# Altium PCB PCB1.PcbDoc
Units mm, origin at the board's own origin, x right, y up, seen from the top; angles counter-clockwise.
Board outline 145.98 x 58.34 mm, 2 copper layers (Top Layer, Bottom Layer), stack 1.671 mm thick; 13 components, 13 nets, 88 pads, 16 vias.
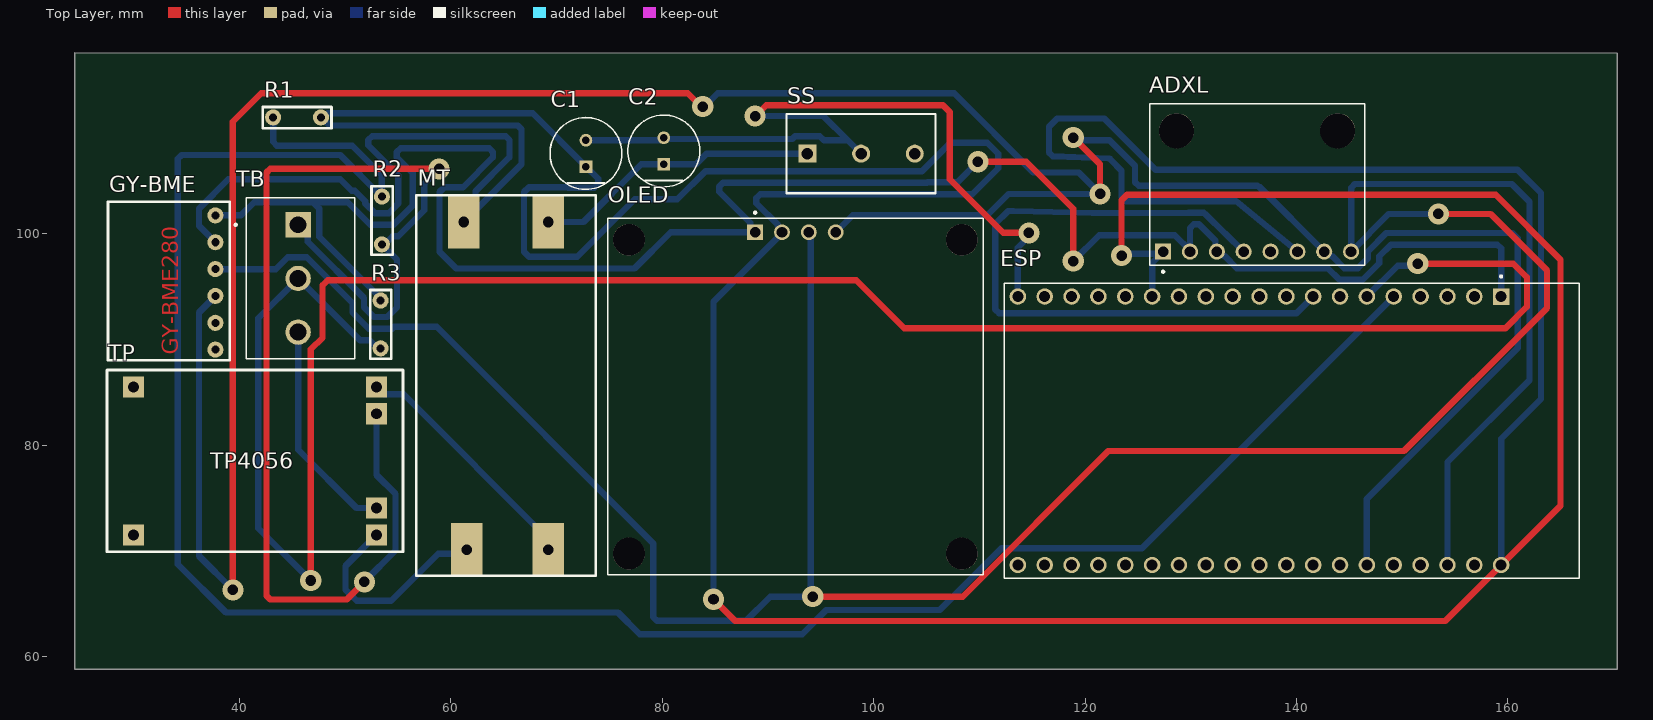
[diagram p0: Top Layer view]
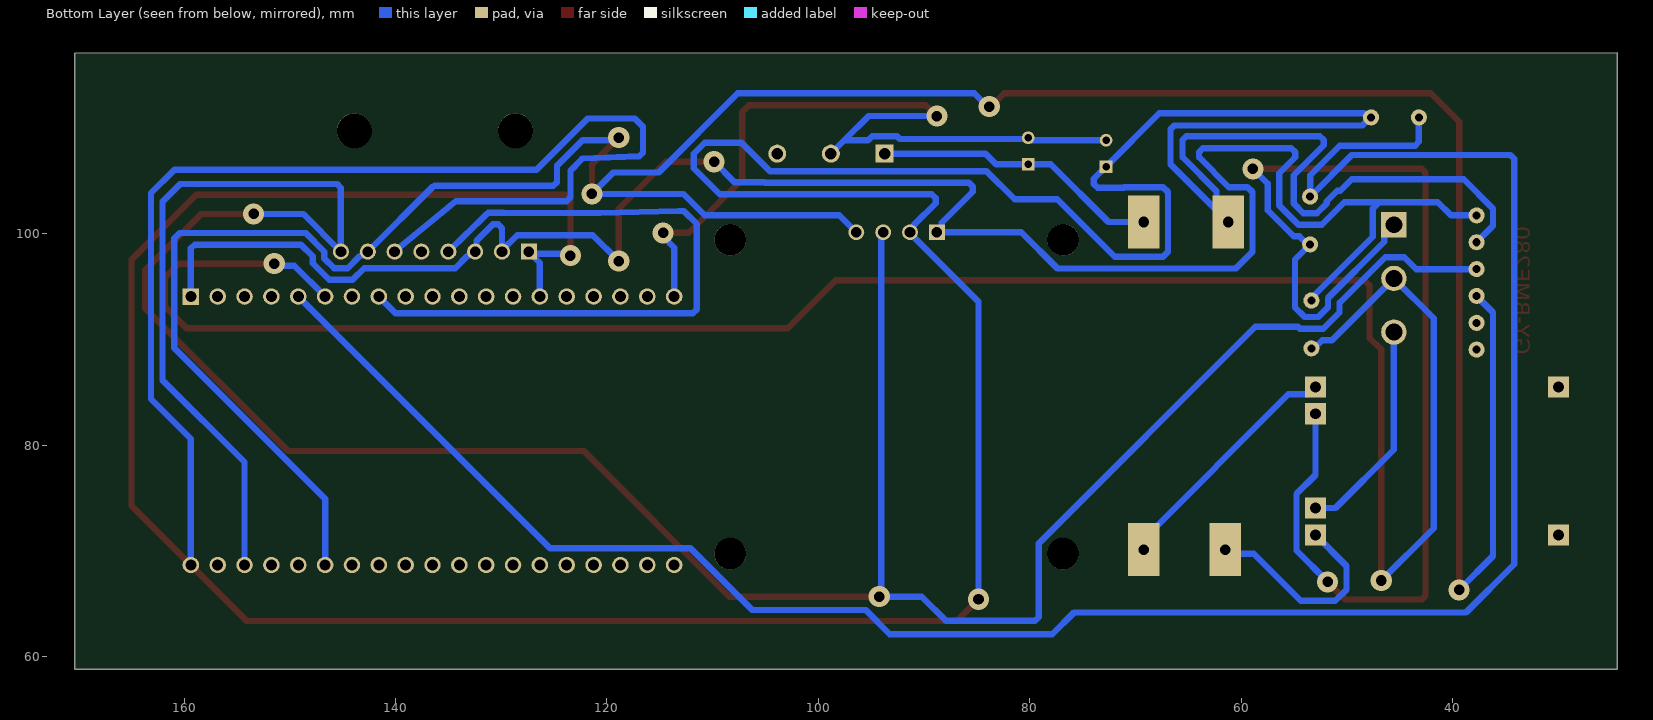
[diagram p1: Bottom Layer view, seen from below]

## Layer stack, top to bottom
Top Solder: solder mask 0.0102, Solder Resist, Dk 3.5
Top Layer: signal copper 0.0356
Dielectric 1: dielectric 1.6, FR-4, Dk 4.8
Bottom Layer: signal copper 0.0356
Bottom Solder: solder mask 0.0102, Solder Resist, Dk 3.5

## Board outline
24.384,58.801 170.365,58.807 170.365,117.05 24.384,117.138

## Design rules (kind name [scope] priority, off if disabled: settings)
BoardOutlineClearance BoardOutlineClearance_1 [All] p1: gap=1 ignorepadtopadclearanceinfootprint=FALSE
Clearance [All] p1: gap=0.5 ignorepadtopadclearanceinfootprint=FALSE
HoleSize [All] p1: absolutevalues=TRUE maxlimit=4 minlimit=0.5 maxpercent=80.000 minpercent=20.000
HoleToHoleClearance [All] p1: gap=0.5 allowstackedmicrovias=TRUE
MinimumSolderMaskSliver [All] p1: minsoldermaskwidth=0.5
PolygonConnect [All] p1: connectstyle=Relief reliefconductorwidth=0.254 reliefentries=4 polygonreliefangle="90 Angle" airgapwidth=0.254
RoutingVias [All] p1: holewidth=1 width=2 viastyle="Through Hole" minholewidth=1 minwidth=2 maxholewidth=1 maxwidth=2
SolderMaskExpansion [All] p1: expansion=0.102 istentingtop=FALSE
Width [All] p1: maxlimit=1 minlimit=0.5 preferedwidth=0.6
27 further rules are at their usual default settings.

## Classes and differential pairs
component class Sheet1: ADXL C1 C2 ESP GY-BME MT OLED R1 R2 R3 SS TB

## Components (designator, comment, footprint, x,y, rotation, side; value= is the part's Value field where it differs from the comment)
ADXL "ADXL345" ADXL345 136.271,104.648 r0 top
C1 "100µF electrolytic" FP-RAD-TH-D_6_3_0_5-L_11-MFG 72.771,107.589 r90 top
C2 "0.1 µF ceramic" FP-RAD-TH-D_6_3_0_5-L_11-MFG 80.137,107.823 r90 top
ESP "ESP32" MODULE_ESP32-DEVKITC-32D 139.597,81.352 r270 top
GY-BME "-" GY-BME280 27.559,88.027 r0 top
MT "MT3608" MT3608 56.715,103.604 r270 top
OLED "" LCD_OLED_128X64_1.3_I2C 92.589,84.585 r0 top
R1 "10K" RESISTOR 42.189,109.982 r0 top
R2 "4.2K" RESISTOR 54.483,97.993 r90 top
R3 "10K" RESISTOR 54.356,88.163 r90 top
SS "Slide Switch" FP-25436NAH6-MFG 98.806,107.569 r0 top
TB "TB007" TB007 45.54,100.842 r270 top
TP "" TP4056Module 27.459,69.901 r0 top

## Footprints (in the part's own frame and the unit in brackets; to place one, negate y for a bottom-side part, rotate by r counter-clockwise, add the part's x,y. Pads: shape width x height; smd on the part's side, far side on the other; paste and mask are expansions set on the pad)
ADXL345 [mil]
  rect 60x60 / inner round 60 / far side rect 60x60 hole 40: 1(-350,-250)
  round 60 hole 40: 2(-250,-250) 3(-150,-250) 4(-50,-250) 5(50,-250) 6(150,-250) 7(250,-250) 8(350,-250)
  round 130 hole 130 unplated: ""(-300,200) ""(300,200)
  silkscreen extent -400,-329 400,300, body extent -400,-300 400,300, height 39
FP-25436NAH6-MFG [mm]
  rect 1.7x1.7 hole 1.1 paste-2539.97 mask+0: 1(-5.08,0)
  round 1.7 hole 1.1 paste-2539.97 mask+0: 2(0,0) 3(5.08,0)
  silkscreen extent -7.05,-3.75 7.05,3.75, body extent -7.15,-3.85 7.15,3.85, height 0.25
FP-RAD-TH-D_6_3_0_5-L_11-MFG [mm]
  rect 1.2x1.2 hole 0.7 paste-2539.97 mask+0: 1(-1.25,0)
  round 1.2 hole 0.7 paste-2539.97 mask+0: 2(1.25,0)
  silkscreen extent -3.4,-3.4 3.4,3.4, body extent -3.5,-3.5 3.5,3.5, height 0.25
GY-BME280 [mil]
  round 60 hole 30: 1(400,539.37) 2(400,439.37) 3(400,339.37) 4(400,239.37) 5(400,139.37) 6(400,39.37)
  silkscreen extent 0,0 453,591
LCD_OLED_128X64_1.3_I2C [mm]
  rect 1.508x1.508 / inner round 1.508 / far side rect 1.508x1.508 hole 1: 1(-3.81,15.55)
  round 1.508 hole 1: 2(-1.27,15.55) 3(1.27,15.55) 4(3.81,15.55)
  round 3 hole 3 unplated: ""(-15.75,-14.85) ""(-15.75,14.85) ""(15.75,-14.85) ""(15.75,14.85)
  silkscreen extent -17.75,-16.85 17.75,17.5
MODULE_ESP32-DEVKITC-32D [mm]
  rect 1.56x1.56 / inner round 1.56 / far side rect 1.56x1.56 hole 1.04: J2-1(-12.7,19.76)
  round 1.56 hole 1.04: J2-2(-12.7,17.22) J2-3(-12.7,14.68) J2-4(-12.7,12.14) J2-5(-12.7,9.6) J2-6(-12.7,7.06) J2-7(-12.7,4.52) J2-8(-12.7,1.98) J2-9(-12.7,-0.56) J2-10(-12.7,-3.1) J2-11(-12.7,-5.64) J2-12(-12.7,-8.18) J2-13(-12.7,-10.72) J2-14(-12.7,-13.26) J2-15(-12.7,-15.8) J2-16(-12.7,-18.34) J2-17(-12.7,-20.88) J2-18(-12.7,-23.42) J2-19(-12.7,-25.96) J3-1(12.7,19.76) J3-2(12.7,17.22) J3-3(12.7,14.68) J3-4(12.7,12.14) J3-5(12.7,9.6) J3-6(12.7,7.06) J3-7(12.7,4.52) J3-8(12.7,1.98) J3-9(12.7,-0.56) J3-10(12.7,-3.1) J3-11(12.7,-5.64) J3-12(12.7,-8.18) J3-13(12.7,-10.72) J3-14(12.7,-13.26) J3-15(12.7,-15.8) J3-16(12.7,-18.34) J3-17(12.7,-20.88) J3-18(12.7,-23.42) J3-19(12.7,-25.96)
  silkscreen extent -14.7,-27.25 13.95,27.15, body extent -13.97,-27.9 13.97,27.2, height 6.69
MT3608 [mm]
  rect 5x3 hole 1: 1(2.5,12.5) 2(2.5,4.5) 3(33.5,12.5) 4(33.5,4.775)
  silkscreen extent -0.04,-0.01 35.96,16.99
RESISTOR [mil]
  round 60 hole 30: 1(217,40) 2(39,40)
  silkscreen extent 0,0 256,79
TB007 [mm]
  rect 2.4x2.4 / inner round 2.4 / far side rect 2.4x2.4 hole 1.6: 1(0,0)
  round 2.4 hole 1.6: 2(5.08,0) 3(10.16,0)
  silkscreen extent -2.54,-6 12.7,5.35
TP4056Module [mm]
  rect 2x2 hole 1.016: 1(2.5,15.6) 2(2.5,1.6) 3(25.5,15.6) 4(25.5,13.06) 5(25.5,4.14) 6(25.5,1.6)
  silkscreen extent 0,0 28,17.2

## Part data
C1 C2: library part CMP-05427-000856-1, "Aluminum Electrolytic Capacitors (Radial Lead Type) 100uF ±20% 25V", Capacitance=100uF, Case/Package=Radial, ESR (Equivalent Series Resistance)=130mR, Max Operating Temperature=105°C, Min Operating Temperature=-40°C, Package Quantity=2000, Ripple Current=455mA, Tolerance=20%, Voltage Rating=25V, Diameter=6mm, Height - Seated (Max)=0.5inch, Impedance=130mR, Lead Diameter=0.5mm, Lead Pitch=5mm, Length=11mm, Life (Hours)=2000Hour, Mount="Through Hole", Packaging="Tape and Reel", Polarity=Polar, RoHS Compliant=Yes, Series=FM, Termination=Radial, Voltage Rating (DC)=25V
GY-BME: library part GY-BME280
OLED: library part OLED_128X64_1.3_I2C, "Non-Touch Graphic LCD Display Module Transmissive White OLED, Monochrome I2C 1.3 (33.02mm) 128 x 64", Package=None, Check_prices=https://www.snapeda.com/parts/OLED%20128x64%201.3%22%20I2C/UNIVERSAL-SOLDER+Electronics+Ltd/view-part/?ref=eda, MF="UNIVERSAL-SOLDER Electronics Ltd", MP="OLED 128x64 1.3&quot; I2C", SnapEDA_Link=https://www.snapeda.com/parts/OLED%20128x64%201.3%22%20I2C/UNIVERSAL-SOLDER+Electronics+Ltd/view-part/?ref=snap
R1 R2 R3: library part resistor
SS: library part CMP-47022-000005-1, "SWITCH SLIDE SPDT 4A 125V", Contact Resistance=10mR, Current Rating=1A, Max Operating Temperature=85°C, Max Voltage Rating (AC)=250V, Max Voltage Rating (DC)=30V, Min Operating Temperature=-40°C, Package Quantity=100, Voltage Rating (AC)=125V, Actuator Length=6mm, Actuator Material=Nylon, Actuator Type=Standard, Contact Material=Silver, Electrical Life=10000Cycles, Mechanical Life=20000Cycles, Mount="Through Hole", Orientation=Straight, Packaging=Bulk, Series=25000N, Switch Function=On-On, Switch Travel=4mm, Termination="PC Pin", Throw Configuration=SPDT, Voltage Rating (DC)=30V
TP: library part TP4056

## Via types
v1: diameter 2, hole 1, Top Layer to Bottom Layer, 16 vias

## Nets (pads, with @x,y where several pads share a name; then routed paths per layer and width w, separated by ;. In a path a pad name is that pad's centre, name@x,y a point inside that pad or via, vN(x,y) a via of type N, cw(c..) or ccw(c..) an arc to the next point about the centre after c; other vN are vias at no path point)
NetADXL_1: ADXL.1 ADXL.6 C1.1 ESP.J2-14 ESP.J3-1 GY-BME.2 MT.2 OLED.2 R1.1 | length 529.2
  Top Layer w0.6: v1(84.836,65.405) 86.883,63.358 154.063,63.358 159.204,68.499 159.204,68.805 159.365,68.965 159.67,68.965 164.973,74.268 164.973,97.536 158.843,103.666 123.957,103.666 123.444,103.154 v1(123.444,97.917)
  Bottom Layer w0.6: GY-BME.2 36.157,100.749 36.157,102.374 38.939,105.156 49.53,105.156 50.61,104.076 50.909,104.076 51.905,103.08 51.905,102.858 52.82,101.943 54.114,101.943 55.029,102.858 55.029,105.531 52.188,108.371 52.188,108.869 52.54,109.22 65.181,109.22 65.532,108.869 65.532,107.235 62.318,104.021 MT.2@62.318,102.207 ; R1.1 R1.1@47.753,110.998 ; MT.2 MT.2@62.318,102.207 ; v1(84.836,65.405) 84.836,93.552 91.32,100.036 91.32,100.381 90.908,100.793 90.908,100.862 88.9,102.87 88.9,103.368 89.251,103.719 109.314,103.719 111.782,106.187 111.782,107.553 110.728,108.607 107.257,108.607 104.569,105.919 84.082,105.919 81.414,103.251 77.403,103.251 71.956,97.804 67.384,97.804 66.915,98.273 66.915,103.935 67.384,104.404 71.046,104.404 71.108,104.342 73.568,104.342 73.92,104.693 73.92,105.191 C1.1 67.731,111.379 48.332,111.379 47.951,110.998 R1.1@47.753,110.998 ; v1(123.444,97.917) 123.634,98.108 127.191,98.108 ADXL.1 126.337,97.254 ESP.J2-14 ; ADXL.6 134.28,103.078 123.795,103.078 123.444,103.43 123.444,105.969 122.472,106.94 122.307,107.105 116.927,107.339 116.762,107.504 116.586,107.68 116.586,110.109 117.37,110.893 121.803,110.893 126.651,106.045 138.793,106.045 160.909,106.045 163.136,103.818 163.136,84.383 159.357,80.603 ESP.J3-1 ; R1.1@47.753,110.998 48.515,110.236 66.324,110.236 66.675,109.885 66.675,106.564 MT.2@62.318,102.207
NetADXL_2: ADXL.2 ADXL.3 ESP.J2-1 GY-BME.1 OLED.1 R3.1 | length 192.5
  Top Layer w0.6: v1(109.857,106.807) 114.433,106.807 118.872,102.368 v1(118.872,97.409)
  Bottom Layer w0.6: GY-BME.1 40.132,101.727 41.381,102.976 50.232,102.976 52.364,100.843 54.57,100.843 56.388,102.661 56.388,105.727 54.887,107.228 54.887,107.726 55.238,108.077 63.618,108.077 63.97,107.726 63.97,107.228 61.145,104.404 59.384,104.404 58.915,103.935 58.915,98.273 60.484,96.704 77.361,96.704 80.792,100.135 OLED.1 88.326,100.589 88.326,101.031 85.387,103.97 85.387,104.468 85.738,104.819 105.025,104.819 105.082,104.876 107.925,104.876 v1(109.857,106.807) ; 47.071,102.842 47.54,102.373 47.54,99.702 53.34,93.902 R3.1 ; v1(118.872,97.409) 121.323,99.86 128.474,99.86 ADXL.2@129.921,98.413 ; ADXL.2 ADXL.2@129.921,98.413 ; ADXL.3 132.33,98.429 132.33,99.318 130.77,100.878 130.272,100.878 129.921,100.527 ADXL.2@129.921,98.413 ; ADXL.3@132.711,98.298 133.121,97.888 133.202,97.888 134.354,96.736 142.958,96.736 144.063,95.632 144.771,95.632 ; 144.772,95.631 146.259,95.631 147.823,97.195 147.823,97.849 148.941,98.966 159.005,98.966 159.357,98.615 ESP.J2-1
NetADXL_4: ADXL.4 ESP.J2-8 | length 64.5
  Bottom Layer w0.6: ADXL.4 131.398,101.81 131.225,101.978 129.817,101.978 122.158,101.959 120.666,101.959 113.216,102.149 112.721,102.149 111.506,100.933 111.506,92.823 111.857,92.472 139.997,92.472 ESP.J2-8
NetADXL_7: ADXL.7 ESP.J3-6 GY-BME.4 OLED.4 | length 282
  Top Layer w0.6: v1(39.37,66.294) 39.37,110.593 42.061,113.284 82.403,113.284 83.673,112.014 v1(83.82,112.014) ; v1(118.872,109.093) 121.412,106.553 v1(121.412,103.759)
  Bottom Layer w0.6: GY-BME.4 36.157,92.545 36.157,69.507 v1(39.37,66.294) ; v1(83.82,112.014) 83.967,112.014 85.237,113.284 107.606,113.284 115.099,105.791 119.38,105.791 v1(121.412,103.759) 112.776,103.759 110.752,101.735 98,101.735 OLED.4 ; v1(118.872,109.093) 119.126,108.839 122.301,108.839 124.714,106.426 124.714,104.872 125.065,104.521 136.274,104.521 136.453,104.466 ADXL.7 142.871,98.298 143.281,97.888 143.362,97.888 144.514,96.736 145.808,96.736 146.723,97.651 146.723,98.304 148.485,100.066 160.424,100.066 160.936,99.554 160.936,89.177 146.657,74.897 ESP.J3-6
NetADXL_8: ADXL.8 ESP.J3-3 GY-BME.3 OLED.3 | length 279.4
  Top Layer w0.6: v1(94.234,65.659) 108.409,65.659 122.184,79.434 150.173,79.434 163.703,92.964 163.703,96.52 158.357,101.866 v1(153.416,101.866)
  Bottom Layer w0.6: GY-BME.3 43.432,96.647 44.547,97.762 46.368,97.762 50.678,93.452 50.678,92.573 52.237,91.013 54.443,91.013 54.615,91.186 58.641,91.186 79.14,70.688 79.14,63.724 79.491,63.373 87.914,63.373 90.2,65.659 v1(94.234,65.659) 94.033,65.86 94.033,99.961 OLED.3 ; v1(153.416,101.866) 148.729,101.866 ADXL.8 145.161,104.342 145.512,104.693 160.356,104.693 162.036,103.013 162.036,86.145 154.277,78.385 ESP.J3-3
NetC1_2: C1.2 C2.2 ESP.J2-19 SS.2 | length 78.2
  Top Layer w0.6: v1(88.773,111.125) 88.808,111.125 89.824,112.141 106.553,112.141 107.188,111.506 107.188,105.156 112.268,100.076 v1(114.681,100.076)
  Bottom Layer w0.6: C1.2 79.741,108.839 79.975,109.073 C2.2 80.252,108.958 92.284,108.958 92.545,109.219 94.907,109.219 95.287,108.839 97.536,108.839 ; v1(88.773,111.125) 95.25,111.125 97.536,108.839 ; SS.2 97.536,108.839 ; ESP.J2-19 113.637,98.653 114.681,99.697 v1(114.681,100.076)
NetC2_1: C2.1 MT.1 SS.1 | length 27.2
  Bottom Layer w0.6: MT.1 72.541,101.104 78.01,106.573 C2.1 83.181,106.573 84.177,107.569 SS.1
NetESP_J2-5: ESP.J2-5 R1.2 R2.1 | length 206.6
  Bottom Layer w0.6: R1.2@43.18,111.204 43.18,108.682 43.531,108.331 50.673,108.331 53.467,105.537 R2.1 49.53,107.442 34.514,107.442 34.163,107.091 34.163,68.707 38.714,64.156 75.798,64.156 77.851,62.103 93.224,62.103 95.51,64.389 106.246,64.389 112.089,70.232 125.377,70.232 ESP.J2-5
NetESP_J2-6: ESP.J2-6 R3.2 TB.2 | length 207.5
  Top Layer w0.6: v1(46.736,67.183) 46.736,89.05 47.852,90.166 47.852,95.105 48.338,95.59 98.357,95.59 102.889,91.059 159.766,91.059 161.798,93.091 161.798,95.885 160.517,97.166 v1(151.47,97.166)
  Bottom Layer w0.6: v1(46.736,67.183) 41.781,72.138 41.781,92.003 TB.2 51.389,89.913 52.331,89.913 R3.2@53.09,89.154 ; ESP.J2-6 149.57,96.965 151.269,96.965 v1(151.47,97.166)
NetMT_3: MT.3 TP.3 | length 23.2
  Bottom Layer w0.6: TP.3 53.659,84.801 55.518,84.801 69.215,71.104 MT.3
NetMT_4: MT.4 TP.6 | length 20.3
  Bottom Layer w0.6: TP.6 50.016,68.558 50.016,66.31 51.07,65.256 54.334,65.256 58.807,69.729 61.115,69.729 MT.4
NetR2_2: R2.2 TB.1 TP.4 | length 115.2
  Top Layer w0.6: v1(51.816,67.056) 50.143,65.383 42.896,65.383 42.545,65.734 42.545,105.781 42.896,106.133 v1(58.882,106.133)
  Bottom Layer w0.6: TB.1 46.44,99.942 46.44,99.246 51.778,93.908 51.778,93.028 52.693,92.113 53.987,92.113 54.902,93.028 54.902,97.549 R2.2 53.717,98.984 54.476,99.743 55.025,99.743 57.488,102.206 57.488,104.739 v1(58.882,106.133) ; v1(51.816,67.056) 51.816,67.088 54.759,70.031 54.759,75.372 52.959,77.172 TP.4
NetTB_3: TB.3 TP.5 | length 20.8
  Bottom Layer w0.6: TB.3 45.54,79.56 51.059,74.041 TP.5
pads on no net: ADXL. ADXL.5 ESP.J2-2 ESP.J2-3 ESP.J2-4 ESP.J2-7 ESP.J2-9 ESP.J2-10 ESP.J2-11 ESP.J2-12 ESP.J2-13 ESP.J2-15 ESP.J2-16 ESP.J2-17 ESP.J2-18 ESP.J3-2 ESP.J3-4 ESP.J3-5 ESP.J3-7 ESP.J3-8 ESP.J3-9 ESP.J3-10 ESP.J3-11 ESP.J3-12 ESP.J3-13 ESP.J3-14 ESP.J3-15 ESP.J3-16 ESP.J3-17 ESP.J3-18 ESP.J3-19 GY-BME.5 GY-BME.6 OLED. SS.3 TP.1 TP.2

## Text inside footprints (layer, text, board x,y; h text height)
GY-BME: Top Layer "GY-BME280" at 34.179,88.527 h1.52 r90
TP: Top Overlay "TP4056" at 37.238,77.775 h1.52